# Altium PCB PCB1.PcbDoc
Units mm, origin at the board's own origin, x right, y up, seen from the top; angles counter-clockwise.
Board outline 38.61 x 29.34 mm, 2 copper layers (Top Layer, Bottom Layer); 17 components, 10 nets, 40 pads, 0 vias.
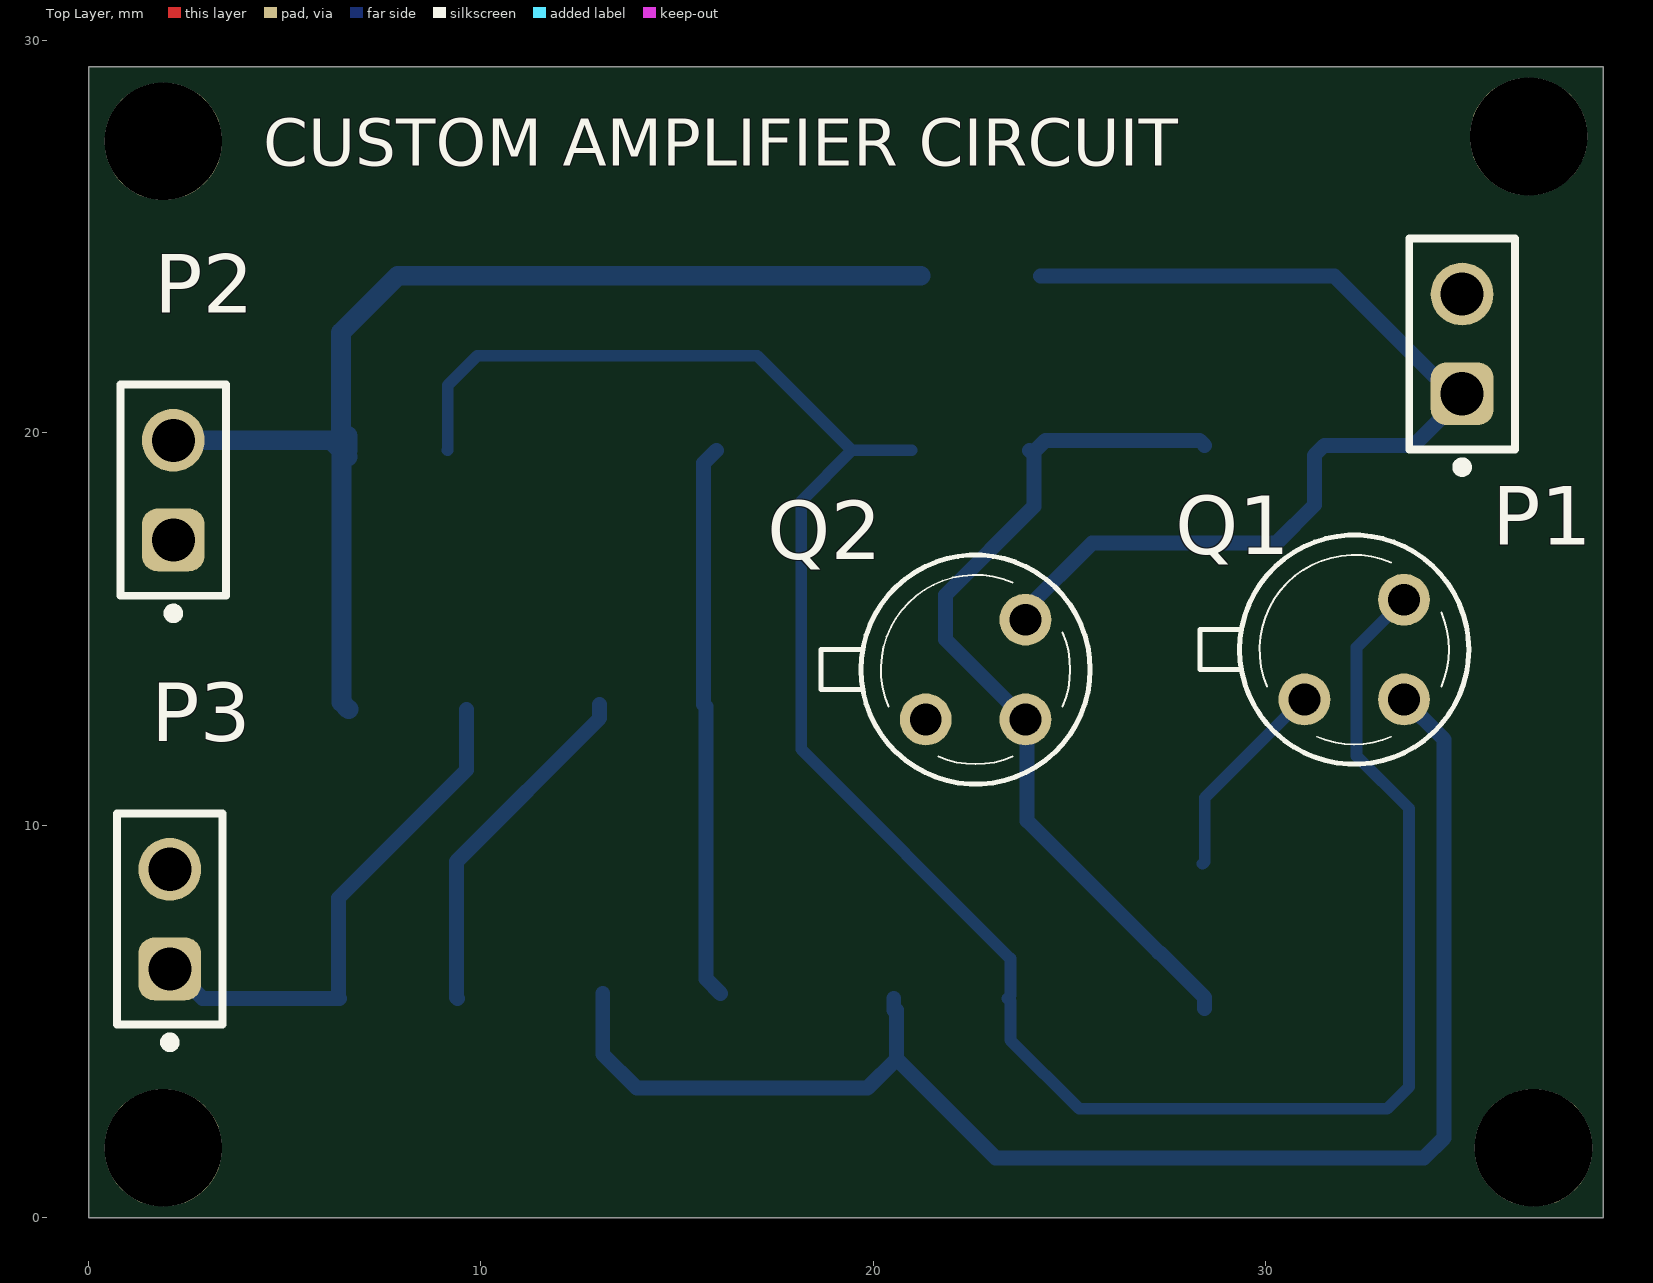
[diagram p0: Top Layer view]
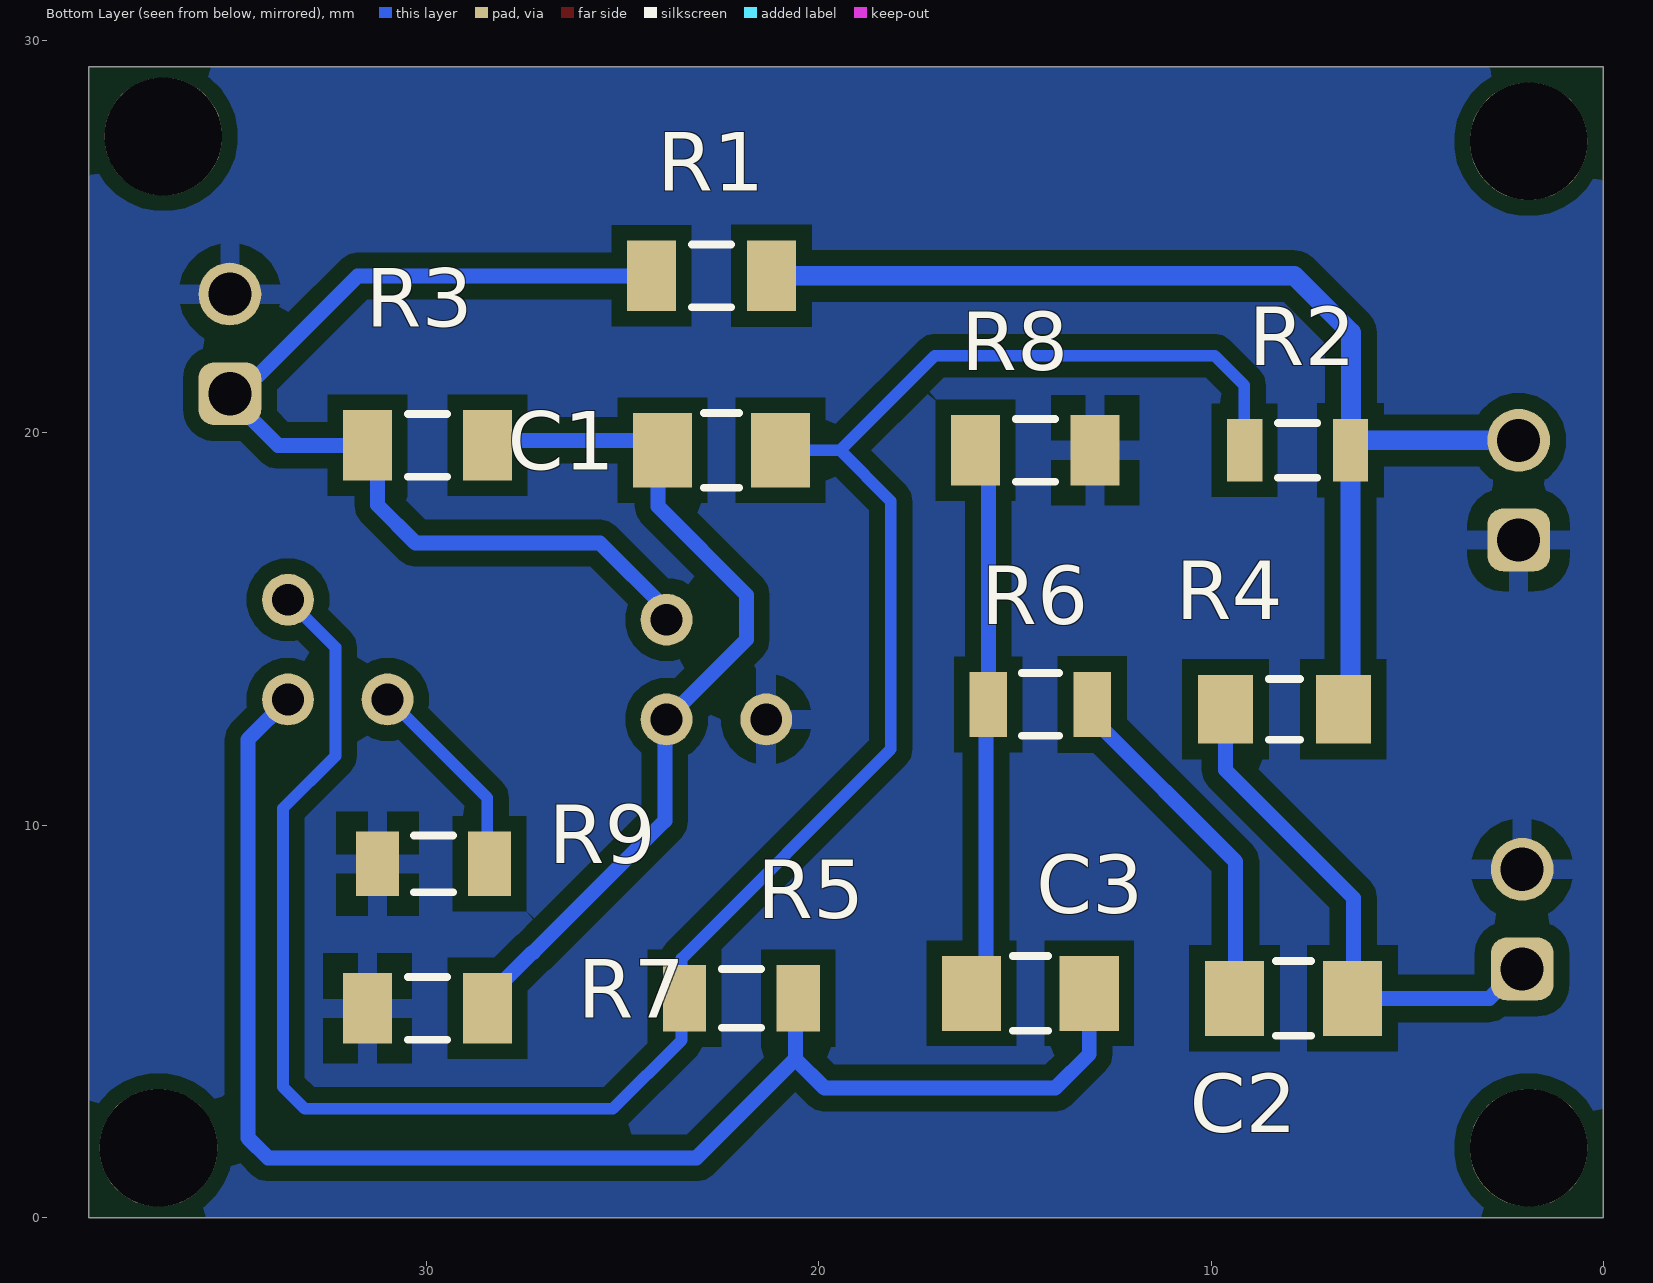
[diagram p1: Bottom Layer view, seen from below]
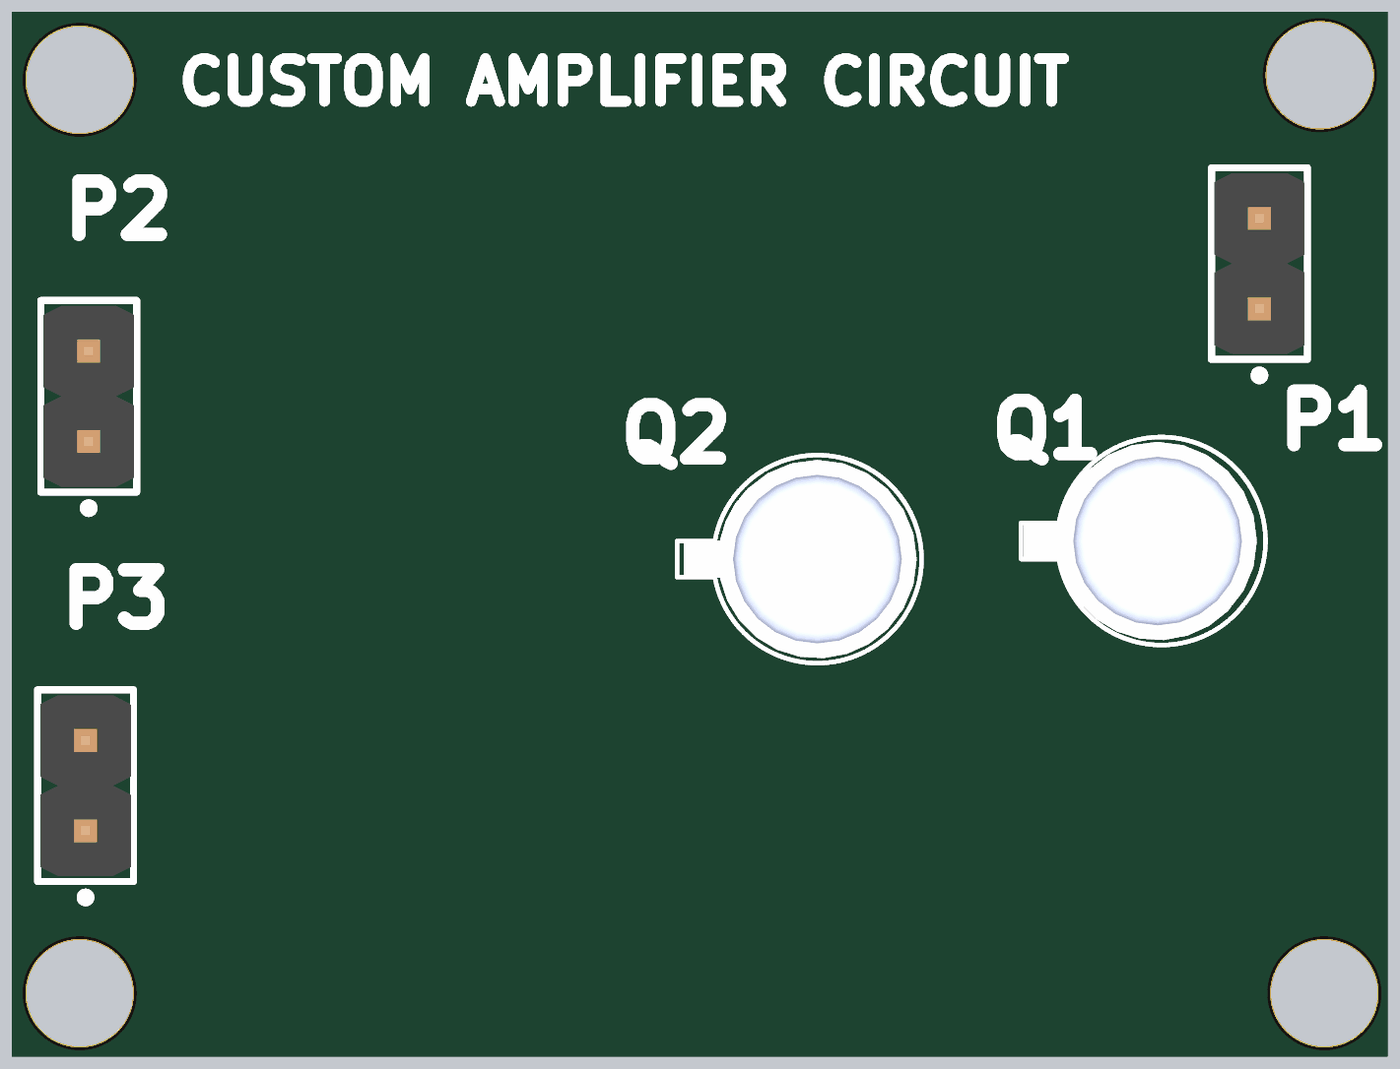
[diagram p2: 3D render of the assembled board from above, using the file's embedded part models]

## Layer stack, top to bottom
Top Solder: solder mask 0.0102, Solder Resist, Dk 3.5
Top Layer: signal copper 0.0356
Dielectric 1: dielectric 0.32, FR-4, Dk 4.8
Bottom Layer: signal copper 0.0356
Bottom Solder: solder mask 0.0102, Solder Resist, Dk 3.5

## Board outline
0,0 38.608,0 38.608,29.337 0,29.337

## Design rules (kind name [scope] priority, off if disabled: settings)
Clearance [All] p1: gap=0.4 ignorepadtopadclearanceinfootprint=FALSE
PlaneConnect [All] p1: planeconnectstyle=Relief reliefexpansion=0.508 reliefentries=4 reliefconductorwidth=0.4 reliefairgap=0.4
PolygonConnect [All] p1: connectstyle=Relief reliefconductorwidth=0.5 reliefentries=4 polygonreliefangle="90 Angle" airgapwidth=0.4
RoutingVias [All] p1: holewidth=0.711 width=1.27 viastyle="Through Hole" minholewidth=0.711 minwidth=1.27 maxholewidth=0.711 maxwidth=1.27
SolderMaskExpansion [All] p1: expansion=0.102 istentingtop=FALSE
SupplyNets "Schematic Supply Nets" [InNet('GND')] p1: voltage=0.000
Width Width_1 [InNet('VCC')] p1: maxlimit=0.5 minlimit=0.254 preferedwidth=0.4
Width [All] p2: maxlimit=0.5 minlimit=0.254 preferedwidth=0.3
29 further rules are at their usual default settings.

## Components (designator, comment, footprint, x,y, rotation, side; value= is the part's Value field where it differs from the comment)
C1 "1uF" FP-1206-L_3_2_0_2-W_1_6_0-IPC_A 22.479,19.558 r0 bottom
C2 "1uF" FP-1206-L_3_2_0_2-W_1_6_0-IPC_A 7.897,5.588 r0 bottom
C3 "1uF" FP-1206-L_3_2_0_2-W_1_6_0-IPC_A 14.605,5.715 r180 bottom
P1 "61300211121" 61300211121 35.007,22.27 r90 top
P2 "61300211121" 61300211121 2.159,18.542 r90 top
P3 "61300211121" 61300211121 2.07,7.608 r90 top
Q1 "BC107A" TO18 32.258,14.478 r0 top
Q2 "BC107A" TO18 22.606,13.97 r0 top
R1 "1K" RESC3116X65X40ML10T20 22.733,24.003 r180 bottom
R2 "5.6K" RESC3216X60X45LL10T20 7.794,19.558 r0 bottom
R3 "2.2K" RESC3116X65X40ML10T20 29.972,19.685 r0 bottom
R4 "Resistor 4k7 +/-1% 1206 250 mW" RESC3116X70X50ML13T20 8.128,12.954 r180 bottom value=4.7k
R5 "56K" RESC3216X60X45NL10T20 21.971,5.588 r0 bottom
R6 "1.5K" FP-CRCW1206-e3-IPC_C 14.351,13.081 r0 bottom
R7 "2.2K" RESC3116X65X40ML10T20 29.972,5.334 r180 bottom
R8 "1K" RESC3116X65X40ML10T20 14.478,19.558 r0 bottom
R9 "330R" RESC3216X70X50NL05T20 29.817,9.017 r180 bottom

## Footprints (in the part's own frame and the unit in brackets; to place one, negate y for a bottom-side part, rotate by r counter-clockwise, add the part's x,y. Pads: shape width x height; smd on the part's side, far side on the other; paste and mask are expansions set on the pad)
61300211121 [mm] "Pin Header, pitch 2.54 mm, THT, Vertical, single row, 2p"
  rrect50% 1.6x1.6 hole 1.1: 1(-1.27,0)
  round 1.6 hole 1.1: 2(1.27,0)
  silkscreen extent -3.26,-1.35 2.69,1.35, body extent -2.54,-1.27 2.54,1.27, height 8.57
FP-1206-L_3_2_0_2-W_1_6_0-IPC_A [mm]
  rect 1.505x1.906 smd paste+0 mask+0: 1(-1.501,0) 2(1.501,0)
  silkscreen extent -0.45,-0.95 0.45,0.95, body extent -1.6,-0.8 1.6,0.8, height 1.78
FP-CRCW1206-e3-IPC_C [mm]
  rect 0.956x1.658 smd paste+0 mask+0: 1(-1.326,0) 2(1.326,0)
  silkscreen extent -0.47,-0.8 0.47,0.8, body extent -1.6,-0.8 1.6,0.8, height 0.6
RESC3116X65X40ML10T20 [mm] "Chip Resistor, 2-Leads, Body 3.10x1.60mm, IPC Low Density"
  rect 1.25x1.8 smd: 1(-1.525,0) 2(1.525,0)
  silkscreen extent -0.5,-0.8 0.5,0.8, body extent -1.6,-0.85 1.6,0.85, height 0.65
RESC3116X70X50ML13T20 [mm] "Chip Resistor, 2-Leads, Body 3.25x1.65mm, IPC Low Density"
  rect 1.4x1.75 smd: 1(-1.5,0) 2(1.5,0)
  silkscreen extent -0.4,-0.78 0.4,0.78, body extent -1.63,-0.82 1.63,0.82, height 0.7
RESC3216X60X45LL10T20 [mm] "Chip Resistor, 2-Leads, Body 3.20x1.60mm, IPC High Density"
  rect 0.9x1.6 smd: 1(-1.35,0) 2(1.35,0)
  silkscreen extent -0.5,-0.7 0.5,0.7, body extent -1.65,-0.85 1.65,0.85, height 0.6
RESC3216X60X45NL10T20 [mm] "Chip Resistor, 2-Leads, Body 3.20x1.60mm, IPC Medium Density"
  rect 1.1x1.7 smd: 1(-1.45,0) 2(1.45,0)
  silkscreen extent -0.5,-0.75 0.5,0.75, body extent -1.65,-0.85 1.65,0.85, height 0.6
RESC3216X70X50NL05T20 [mm] "Chip Resistor, 2-Leads, Body 3.20x1.60mm, IPC Medium Density"
  rect 1.1x1.65 smd: 1(-1.425,0) 2(1.425,0)
  silkscreen extent -0.5,-0.73 0.5,0.73, body extent -1.63,-0.82 1.62,0.82, height 0.7
TO18 [mil]
  round 52 hole 32: 1(-50,-50) 2(50,-50) 3(50,50)
  silkscreen extent -155,-115 115,115, body extent -173,-162 151,161, height 210

## Part data
C1 C2 C3: library part CMP-04427-000096-1, "General Purpose Ceramic Capacitor, 1206, 1uF, 10%, X7R, 15%, 25V", Case Code (Imperial)=1206, Case Code (Metric)=3216, Dielectric=X7R, Insulation Resistance=100GR, Max Operating Temperature=125°C, Min Operating Temperature=-55°C, Package Quantity=1, Tolerance=10%, Voltage=25V, Capacitance=1uF, Case/Package=1206, Construction=Flat, Contact Plating=Tin, Depth=1.6mm, Dissipation Factor=3%, Height=1.78mm, Lead Free="Lead Free", Length=3.2mm, Mount="Surface Mount", Number of Pins=2, Packaging="Tape and Reel", Radiation Hardening=No, REACH SVHC="No SVHC", RoHS Compliant=Yes, Series=-, Size=1.78mm, Termination=SMD/SMT, Thickness=0.07inch, Voltage Rating=25V, Voltage Rating (DC)=25V, Width=1.6mm
P1 P2 P3: library part CMP-1712-00002-6, Color=Black, Contact Resistance=20mΩ, Current Rating=3A, Max Operating Temperature=125°C, Min Operating Temperature=-40°C, Operating Supply Voltage=250V, Connector Type="Male Pin", Contact Gender=Male, Contact Material=Copper, Contact Mating Length=5.9944mm, Contact Plating=Gold, Gender=Male, Height=8.94mm, Housing Material=PBT, Lead Free="Lead Free", Lead Pitch=2.54mm, Mount="Through Hole", NexarPartId=20081794, Number of Contacts=2, Number of Pins=2, Number of Positions=2, Number of Rows=1, Orientation=Vertical, Packaging=Bulk, Pitch=2.54mm, REACH SVHC="No SVHC", RoHS=Compliant, Termination="Through Hole", Voltage Rating=250V
Q1 Q2: "Bipolar (BJT) Transistor", Package="TO-18 Multicomp", Check_prices=https://www.snapeda.com/parts/BC107A/Multicomp/view-part/?ref=eda, MF=Multicomp, MP=BC107A, SnapEDA_Link=https://www.snapeda.com/parts/BC107A/Multicomp/view-part/?ref=snap
R1 R8: library part CMP-2100-03678-1, "Chip Resistor, 1 KOhm, +/- 1%, 0.25 W, -55 to 155 degC, 1206 (3216 Metric), RoHS, Tape and Reel", Case Code (Imperial)=1206, Case Code (Metric)=3216, Manufacturer=Yageo, Max Operating Temperature=155degC, Min Operating Temperature=-55degC, Package Description="2-Pin Surface Mount Device, Body 3.1 x 1.6 mm", Package Reference=1206.0, Power Rating=250mW, Resistance=1KOhm, Temperature Coefficient=100ppm/degreesC, Tolerance=1%, Voltage Rating=200V, Case/Package=1206, Composition=ThickFilm, Datasheet URL=http://www.yageo.com/NewPortal/yageodocoutput?fileName=/pdf/R-Chip/PYu-RC_Group_51_RoHS_L_5.pdf, Datasheet Version="Rev. 5, 10/2016", Depth=1.6mm, Height=0.55mm, Lead Free=LeadFree, Length=3.1mm, Manufacturer URL=http://www.yageo.com/, Military Standard=Not, Packaging=TapeandReel, REACH SVHC=Unknown, RoHSCompliant=true, Termination=SMD/SMT
R2: library part CMP-2003-02302-1, Manufacturer="Vishay Dale", Part Number=CRCW12065K60FKEA
R3 R7: library part CMP-1014-00546-2, "Chip Resistor, 2.2 KOhm, +/- 1%, 250 mW, -55 to 155 degC, 1206 (3216 Metric), RoHS, Tape and Reel", Case Code (Imperial)=1206, Case Code (Metric)=3216, Manufacturer=Yageo, Max Operating Temperature=155degC, Max Power Dissipation=250mW, Min Operating Temperature=-55degC, Package Description="2-Pin Surface Mount Device, Body 3.1 x 1.6 mm", Package Quantity=1, Package Reference=1206.0, Resistance=2.2KOhm, Temperature Coefficient=100ppm/degreesC, Tolerance=1%, Voltage Rating=200V, Case/Package=1206, Composition=ThickFilm, Datasheet URL=http://www.yageo.com/NewPortal/yageodocoutput?fileName=/pdf/R-Chip/PYu-RC_Group_51_RoHS_L_5.pdf, Datasheet Version="Rev. 5, 10/2016", Depth=1.6mm, Height=0.55mm, Lead Free=LeadFree, Length=3.1mm, Manufacturer URL=http://www.yageo.com/, Military Standard=Not, Number of Terminations=2, Packaging=TapeandReel, Power Rating=250mW, REACH SVHC=Unknown, RoHSCompliant=true, Termination=SMD/SMT, Weight=0.000571oz, Width=0.063inch
R4: library part CMP-009-00033-5, "Chip Resistor, 4.7 KOhm, +/- 1%, 0.25 W, -55 to 155 degC, 1206 (3216 Metric)", Case/Package=1206, Max Operating Temperature=155°C, Min Operating Temperature=-55°C, Power=250mW, Tolerance=1%, Voltage Rating=200V, Mounting Technology=SM, Pins=2, RoHS Compliant=True
R5: library part CMP-2003-02283-1, Manufacturer="Vishay Dale", Part Number=CRCW120656K0JNEA
R6: library part CMP-02407-002229-1, "RES Thick Film, 1.5kΩ, 1%, 0.25W, 100ppm/°C, 1206", Case Code (Imperial)=1206, Case Code (Metric)=3216, Max Operating Temperature=155°C, Max Power Dissipation=250mW, Min Operating Temperature=-55°C, Package Quantity=10, Resistance=1.5kR, Temperature Coefficient=100ppm/°C, Tolerance=1%, Voltage Rating=200V, Case/Package=1206, Composition="Thick Film", Contact Plating=Tin, Depth=1.6mm, Features="Automotive AEC-Q200", Height=0.024inch, Lead Free="Lead Free", Length=3.2mm, Military Standard=Not, Number of Terminations=2, Packaging="Tape and Reel", Power Rating=250mW, Radiation Hardening=No, Termination=SMD/SMT, Voltage Rating (DC)=200V, Weight=0.000353oz, Width=0.063inch
R9: library part CMP-2003-00307-1, Manufacturer=Panasonic, Part Number=ERJ8ENF3300V

## Free pads (board coordinates)
  round 3 hole 3: 2(1.905,27.432) 3(36.703,27.559) 4(36.83,1.778) 5(1.905,1.778)

## Nets (pads, with @x,y where several pads share a name; then routed paths per layer and width w, separated by ;. In a path a pad name is that pad's centre, name@x,y a point inside that pad or via, vN(x,y) a via of type N, cw(c..) or ccw(c..) an arc to the next point about the centre after c; other vN are vias at no path point)
GND: P1.2 P2.1 P3.2 Q2.1 R7.1 R8.1 R9.1
NetC1_1: C1.1 Q1.3 R2.2 R5.2 | length 57.2
  Bottom Layer w0.3: R2.2 9.153,19.567 9.153,21.218 9.906,21.971 17.041,21.971 19.454,19.558 ; C1.1 19.56,19.558 19.454,19.558 ; Q1.3 32.318,14.538 32.318,11.765 33.655,10.428 33.655,3.333 33.094,2.772 25.249,2.772 23.495,4.526 23.495,5.514 R5.2 23.495,5.662 23.495,6.604 18.161,11.938 18.161,18.265 19.454,19.558
NetC1_2: C1.2 Q2.2 R3.1 R7.2 | length 22.6
  Bottom Layer w0.381: R7.2 28.447,5.609 27.293,6.763 27.273,6.763 23.922,10.114 23.922,12.654 21.844,14.732 21.844,15.875 24.099,18.13 24.099,19.439 C1.2 24.007,19.531 24.11,19.531 24.391,19.812 28.32,19.812 R3.1
NetC2_1: C2.1 P3.1 R4.1 | length 13.4
  Bottom Layer w0.381: P3.1 2.152,6.338 2.903,5.588 C2.1 6.373,5.611 6.373,8.151 9.628,11.406 R4.1
NetC2_2: C2.2 R6.1 | length 9
  Bottom Layer w0.381: C2.2 9.375,5.611 9.375,9.08 13.025,12.73 R6.1
NetC3_1: C3.1 R6.2 R8.2 | length 14.2
  Bottom Layer w0.381: R8.2 15.677,19.232 R6.2 15.735,13.023 15.735,6.086 C3.1
NetC3_2: C3.2 Q1.2 R5.1 | length 38
  Bottom Layer w0.381: C3.2 13.104,4.168 13.97,3.302 19.854,3.302 20.595,4.043 ; R5.1@20.521,5.288 R5.1 ; R5.1@20.595,5.288 20.595,4.043 ; Q1.2 34.544,12.192 34.544,2.032 34.036,1.524 23.114,1.524 20.595,4.043
NetP1_1: P1.1 Q2.3 R1.1 R3.2 | length 26.5
  Bottom Layer w0.381: Q2.3 23.876,15.494 25.58,17.198 30.279,17.198 31.242,18.161 31.242,19.43 R3.2 33.782,19.685 35.007,20.91 P1.1 34.572,21.435 34.318,21.435 31.75,24.003 R1.1
NetQ1_1: Q1.1 R9.2 | length 5.3
  Bottom Layer w0.3: R9.2 28.448,9.073 28.448,9.243 28.448,10.701 30.955,13.208 Q1.1
VCC: P2.2 R1.2 R2.1 R4.2 | length 29.6
  Bottom Layer w0.5: P2.2 R2.1@6.19,19.812 ; R2.1@6.431,20.095 6.431,22.56 7.874,24.003 R1.2 ; R2.1@6.444,19.398 6.444,13.138 R4.2 ; R2.1@6.444,19.908 6.348,19.812 R2.1@6.19,19.812 ; R2.1@6.604,19.398 R2.1 6.269,19.733 R2.1@6.19,19.812 ; R2.1@6.604,19.558 R2.1@6.604,19.923

## Polygon pours and split planes (outlines as drawn)
GND on Bottom Layer "NONET_L02_P-001" (solid, pour order 0): 0,29.337 38.608,29.337 38.608,0 0,0

## Other copper
Multi-Layer:
  lines w0.254: -0.002,32.131 0.002,31.623 ; 1.521,32.395 0,31.877 ; 1.527,31.379 0,31.877 ; 11.217,31.951 0,31.877 ; 27.264,32.057 38.481,32.131 ; 36.954,32.629 38.481,32.131 ; 36.96,31.613 38.481,32.131 ; 38.479,32.385 38.483,31.877 ; 40.901,27.811 41.402,29.337 ; 41.014,1.522 41.529,0 ; 41.148,29.336 41.656,29.338 ; 41.275,-0.001 41.783,0.001 ; 41.431,22.692 41.402,29.337 ; 41.5,6.645 41.529,0 ; 41.917,27.815 41.402,29.337 ; 42.03,1.526 41.529,0
  text "38.482 (mm)" at 11.477,31.039 h1.52 r0.38
  text "29.337 (mm)" at 40.518,22.434 h1.52 r270.25

## Silkscreen, mask and mechanical layers (free items; w line width, h text height)
Top Overlay:
  text "CUSTOM AMPLIFIER CIRCUIT" at 4.456,26.808 h1.2

## Text inside footprints (layer, text, board x,y; h text height)
Q1: Top 3D Body "3" at 32.258,15.113 h1.27; Top 3D Body "2" at 32.893,13.208 h1.27; Top 3D Body "1" at 30.353,13.208 h1.27
Q2: Top 3D Body "3" at 22.606,14.605 h1.27; Top 3D Body "2" at 23.241,12.7 h1.27; Top 3D Body "1" at 20.701,12.7 h1.27